# EAGLE board Particlematrix10x5 (EAGLE 7.3.0)
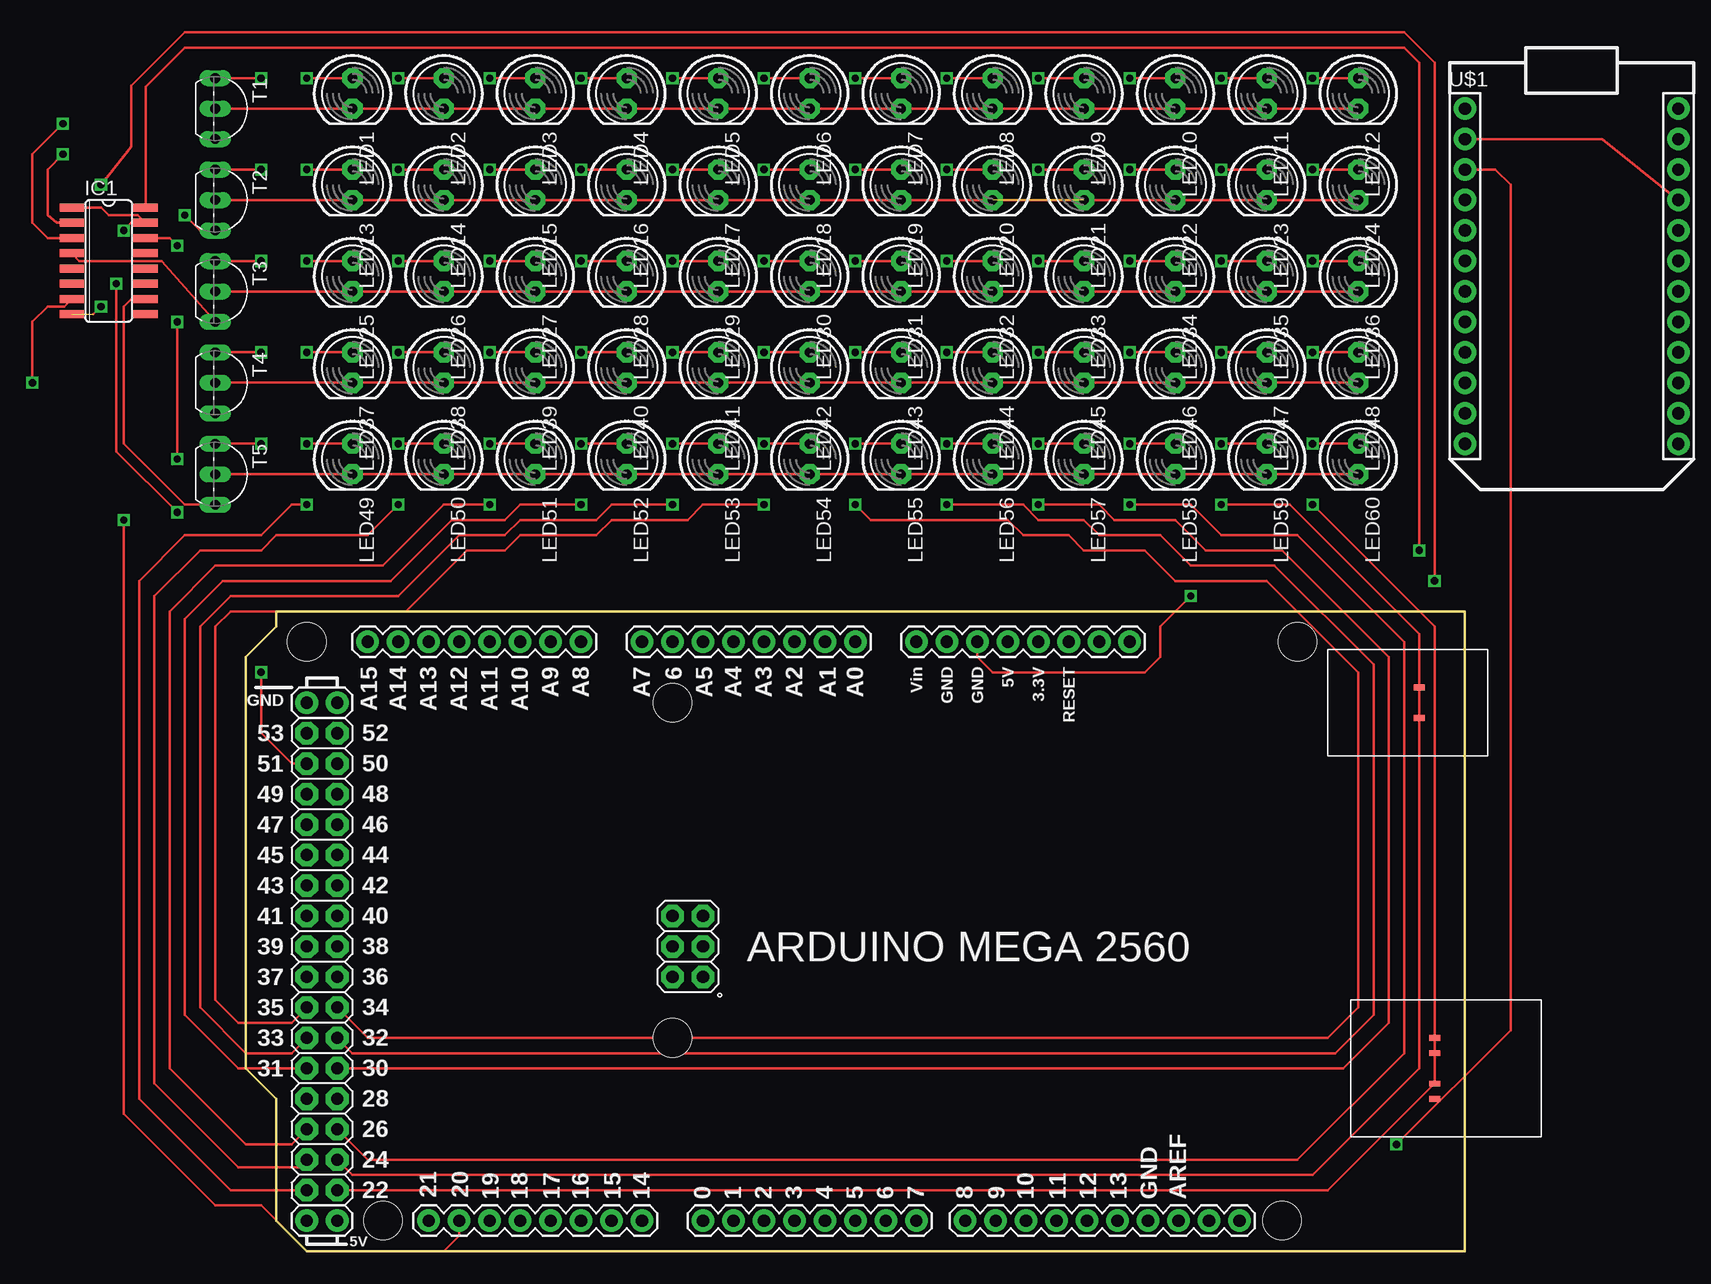
[diagram p0: board, top side]
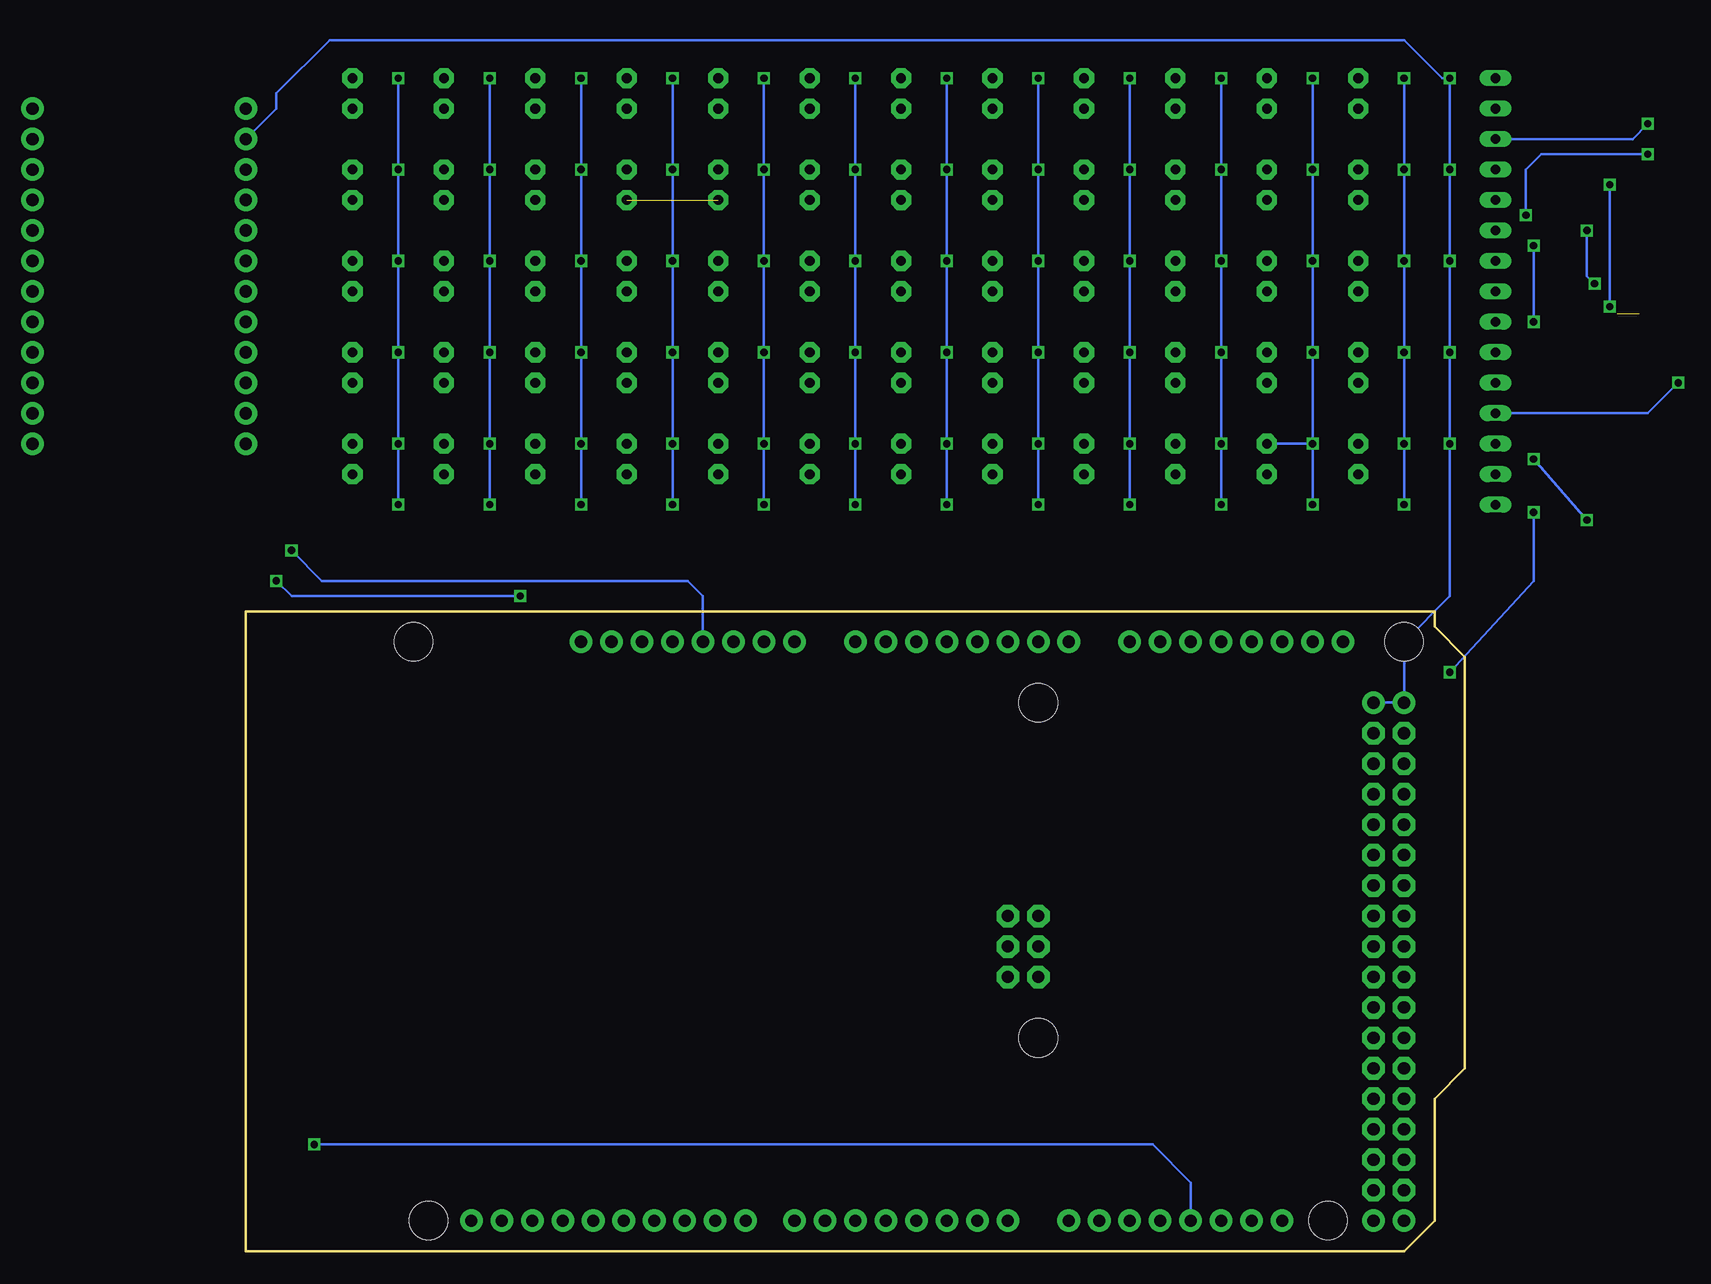
[diagram p1: board, bottom side, seen from below]

Size 101.6 x 53.34 mm. Coordinates in mm from the lower left corner, seen from the top.
Copper layers (1*16): Top 0.035mm / dielectric 1.5mm / Bottom 0.035mm
Design rules "default": minimum track width 10mil, minimum drill 24mil, track to track 8mil, track to pad 8mil, pad to pad 8mil, via to via 8mil, smd to smd 8mil, copper to edge 40mil, drill to drill 8mil, minimum pad ring 10mil, minimum via ring 8mil, stop-mask expansion 4mil, vias tented up to drill 0mil, thermal gap 10mil

## Footprints (pad centres in the part's own frame; a part is rotated, then mirrored left to right if it is on the bottom)
SO16 = smd 0.66 x 2.032: 1 -4.445,-3.073; 2 -3.175,-3.073; 3 -1.905,-3.073; 4 -0.635,-3.073; 5 0.635,-3.073; 6 1.905,-3.073; 7 3.175,-3.073; 8 4.445,-3.073; 9 4.445,3.073; 10 3.175,3.073; 11 1.905,3.073; 12 0.635,3.073; 13 -0.635,3.073; 14 -1.905,3.073; 15 -3.175,3.073; 16 -4.445,3.073
LED5MM = drill 0.813 pad 1.676 octagon: A -1.27,0; K 1.27,0
ARDUINO_MEGA2560 = drill 1.016 pad 1.88: 0 63.5,50.8; 1 60.96,50.8; 2 58.42,50.8; 3 55.88,50.8; 3.3V 35.56,2.54; 4 53.34,50.8; 5 50.8,50.8; 5V 38.1,2.54; 5V. 93.98,50.8; 5V.. 96.52,50.8; 6 48.26,50.8; 7 45.72,50.8; 8 41.656,50.8; 9 39.116,50.8; 10 36.576,50.8; 11 34.036,50.8; 12 31.496,50.8; 13 28.956,50.8; 14 68.58,50.8; 15 71.12,50.8; 16 73.66,50.8; 17 76.2,50.8; 18 78.74,50.8; 19 81.28,50.8; 20 83.82,50.8; 21 86.36,50.8; A0 50.8,2.54; A1 53.34,2.54; A2 55.88,2.54; A3 58.42,2.54; A4 60.96,2.54; A5 63.5,2.54; A6 66.04,2.54; A7 68.58,2.54; A8 73.66,2.54; A9 76.2,2.54; A10 78.74,2.54; A11 81.28,2.54; A12 83.82,2.54; A13 86.36,2.54; A14 88.9,2.54; A15 91.44,2.54; AREF 23.876,50.8; GND 26.416,50.8; GND. 43.18,2.54; GND.. 40.64,2.54; GND... 93.98,7.62; GND.... 96.52,7.62; I/OREF 30.48,2.54; N/C 27.94,2.54; RESET 33.02,2.54; SCL1 18.796,50.8; SDA1 21.336,50.8; VIN 45.72,2.54 | drill 1.016 pad 1.88 octagon: 22 93.98,48.26; 23 96.52,48.26; 24 93.98,45.72; 25 96.52,45.72; 26 93.98,43.18; 27 96.52,43.18; 28 93.98,40.64; 29 96.52,40.64; 30 93.98,38.1; 31 96.52,38.1; 32 93.98,35.56; 33 96.52,35.56; 34 93.98,33.02; 35 96.52,33.02; 36 93.98,30.48; 37 96.52,30.48; 38 93.98,27.94; 39 96.52,27.94; 40 93.98,25.4; 41 96.52,25.4; 42 93.98,22.86; 43 96.52,22.86; 44 93.98,20.32; 45 96.52,20.32; 46 93.98,17.78; 47 96.52,17.78; 48 93.98,15.24; 49 96.52,15.24; 50 93.98,12.7; 51 96.52,12.7; 52 93.98,10.16; 53 96.52,10.16; +5V_ 66.04,30.48; GND__ 66.04,25.4; MISO 63.5,30.48; MOSI 66.04,27.94; RESET. 63.5,25.4; SCK 63.5,27.94 | smd 1.016 x 0.508: <PWR>+V 3.81,8.89; <PWR>-V 3.81,6.35; <USB>+V 2.54,40.64; <USB>D+ 2.54,39.37; <USB>D- 2.54,36.83; <USB>GND 2.54,35.56 | hole 3.2: 15.24,50.8; 13.97,2.54; 66.04,35.56; 66.04,7.62; 90.17,50.8; 96.52,2.54
TO92-EBC = drill 0.813 long: B 0,-1.27; C 2.54,-1.27; E -2.54,-1.27
SPARK_CORE = drill 1.016 pad 1.88: 1 -8.89,13.97; 2 -8.89,11.43; 3 -8.89,8.89; 4 -8.89,6.35; 5 -8.89,3.81; 6 -8.89,1.27; 7 -8.89,-1.27; 8 -8.89,-3.81; 9 -8.89,-6.35; 10 -8.89,-8.89; 11 -8.89,-11.43; 12 -8.89,-13.97; 13 8.89,-13.97; 14 8.89,-11.43; 15 8.89,-8.89; 16 8.89,-6.35; 17 8.89,-3.81; 18 8.89,-1.27; 19 8.89,1.27; 20 8.89,3.81; 21 8.89,6.35; 22 8.89,8.89; 23 8.89,11.43; 24 8.89,13.97

## Placement (x,y rotation side)
IC1  4017D  [SO16]  -11.43,82.55 270 top  (outside the outline)
LED1  [LED5MM]  8.89,96.52 270 top  (outside the outline)
LED2  [LED5MM]  16.51,96.52 270 top  (outside the outline)
LED3  [LED5MM]  24.13,96.52 270 top  (outside the outline)
LED4  [LED5MM]  31.75,96.52 270 top  (outside the outline)
LED5  [LED5MM]  39.37,96.52 270 top  (outside the outline)
LED6  [LED5MM]  46.99,96.52 270 top  (outside the outline)
LED7  [LED5MM]  54.61,96.52 270 top  (outside the outline)
LED8  [LED5MM]  62.23,96.52 270 top  (outside the outline)
LED9  [LED5MM]  69.85,96.52 270 top  (outside the outline)
LED10  [LED5MM]  77.47,96.52 270 top  (outside the outline)
LED11  [LED5MM]  85.09,96.52 270 top  (outside the outline)
LED12  [LED5MM]  92.71,96.52 270 top  (outside the outline)
LED13  [LED5MM]  8.89,88.9 270 top  (outside the outline)
LED14  [LED5MM]  16.51,88.9 270 top  (outside the outline)
LED15  [LED5MM]  24.13,88.9 270 top  (outside the outline)
LED16  [LED5MM]  31.75,88.9 270 top  (outside the outline)
LED17  [LED5MM]  39.37,88.9 270 top  (outside the outline)
LED18  [LED5MM]  46.99,88.9 270 top  (outside the outline)
LED19  [LED5MM]  54.61,88.9 270 top  (outside the outline)
LED20  [LED5MM]  62.23,88.9 270 top  (outside the outline)
LED21  [LED5MM]  69.85,88.9 270 top  (outside the outline)
LED22  [LED5MM]  77.47,88.9 270 top  (outside the outline)
LED23  [LED5MM]  85.09,88.9 270 top  (outside the outline)
LED24  [LED5MM]  92.71,88.9 270 top  (outside the outline)
LED25  [LED5MM]  8.89,81.28 270 top  (outside the outline)
LED26  [LED5MM]  16.51,81.28 270 top  (outside the outline)
LED27  [LED5MM]  24.13,81.28 270 top  (outside the outline)
LED28  [LED5MM]  31.75,81.28 270 top  (outside the outline)
LED29  [LED5MM]  39.37,81.28 270 top  (outside the outline)
LED30  [LED5MM]  46.99,81.28 270 top  (outside the outline)
LED31  [LED5MM]  54.61,81.28 270 top  (outside the outline)
LED32  [LED5MM]  62.23,81.28 270 top  (outside the outline)
LED33  [LED5MM]  69.85,81.28 270 top  (outside the outline)
LED34  [LED5MM]  77.47,81.28 270 top  (outside the outline)
LED35  [LED5MM]  85.09,81.28 270 top  (outside the outline)
LED36  [LED5MM]  92.71,81.28 270 top  (outside the outline)
LED37  [LED5MM]  8.89,73.66 270 top  (outside the outline)
LED38  [LED5MM]  16.51,73.66 270 top  (outside the outline)
LED39  [LED5MM]  24.13,73.66 270 top  (outside the outline)
LED40  [LED5MM]  31.75,73.66 270 top  (outside the outline)
LED41  [LED5MM]  39.37,73.66 270 top  (outside the outline)
LED42  [LED5MM]  46.99,73.66 270 top  (outside the outline)
LED43  [LED5MM]  54.61,73.66 270 top  (outside the outline)
LED44  [LED5MM]  62.23,73.66 270 top  (outside the outline)
LED45  [LED5MM]  69.85,73.66 270 top  (outside the outline)
LED46  [LED5MM]  77.47,73.66 270 top  (outside the outline)
LED47  [LED5MM]  85.09,73.66 270 top  (outside the outline)
LED48  [LED5MM]  92.71,73.66 270 top  (outside the outline)
LED49  [LED5MM]  8.89,66.04 270 top  (outside the outline)
LED50  [LED5MM]  16.51,66.04 270 top  (outside the outline)
LED51  [LED5MM]  24.13,66.04 270 top  (outside the outline)
LED52  [LED5MM]  31.75,66.04 270 top  (outside the outline)
LED53  [LED5MM]  39.37,66.04 270 top  (outside the outline)
LED54  [LED5MM]  46.99,66.04 270 top  (outside the outline)
LED55  [LED5MM]  54.61,66.04 270 top  (outside the outline)
LED56  [LED5MM]  62.23,66.04 270 top  (outside the outline)
LED57  [LED5MM]  69.85,66.04 270 top  (outside the outline)
LED58  [LED5MM]  77.47,66.04 270 top  (outside the outline)
LED59  [LED5MM]  85.09,66.04 270 top  (outside the outline)
LED60  [LED5MM]  92.71,66.04 270 top  (outside the outline)
PCB1  ARDUINO_MEGA2560  [ARDUINO_MEGA2560]  101.6,53.34 180 top
T1  [TO92-EBC]  -1.27,95.25 270 top  (outside the outline)
T2  [TO92-EBC]  -1.27,87.63 270 top  (outside the outline)
T3  [TO92-EBC]  -1.27,80.01 270 top  (outside the outline)
T4  [TO92-EBC]  -1.27,72.39 270 top  (outside the outline)
T5  [TO92-EBC]  -1.27,64.77 270 top  (outside the outline)
U$1  SPARK_CORECORE  [SPARK_CORE]  110.49,81.28 0 top  (outside the outline)

## Library data of the parts
IC1 = 40xx
LED1-LED60 = adafruit
PCB1 = E14_Arduino_revB
T1-T5 = transistor-neu-to92
U$1 = Spark

## Nets
COL1: LED1.A LED13.A LED25.A LED37.A LED49.A PCB1.23
COL2: LED2.A LED14.A LED26.A LED38.A LED50.A PCB1.25
COL3: LED3.A LED15.A LED27.A LED39.A LED51.A PCB1.27
COL4: LED4.A LED16.A LED28.A LED40.A LED52.A PCB1.31
COL5: LED5.A LED17.A LED29.A LED41.A LED53.A PCB1.33
COL6: LED6.A LED18.A LED30.A LED42.A LED54.A PCB1.35
COL7: LED7.A LED19.A LED31.A LED43.A LED55.A PCB1.34
COL8: LED8.A LED20.A LED32.A LED44.A LED56.A PCB1.32
COL9: LED9.A LED21.A LED33.A LED45.A LED57.A PCB1.30
COL10: LED10.A LED22.A LED34.A LED46.A LED58.A PCB1.26
COL11: LED11.A LED23.A LED35.A LED47.A LED59.A PCB1.24
COL12: LED12.A LED24.A LED36.A LED48.A LED60.A PCB1.22
GND: PCB1.GND... PCB1.GND.... T1.E T2.E T3.E T4.E T5.E U$1.2 U$1.21
N$1: IC1.3 T1.C
N$2: IC1.2 T2.C
N$3: IC1.4 T3.C
N$4: IC1.7 T4.C
N$5: IC1.10 T5.C
N$6: IC1.16 PCB1.5V
N$7: IC1.14 PCB1.20
N$8: IC1.1 IC1.15 PCB1.51
N$9: IC1.8 PCB1.GND..
N$10: PCB1.18 U$1.3
RAW: U$1.1
ROW1: LED1.K LED2.K LED3.K LED4.K LED5.K LED6.K LED7.K LED8.K LED9.K LED10.K LED11.K LED12.K T1.B
ROW2: LED13.K LED14.K LED15.K LED16.K LED17.K LED18.K LED19.K LED20.K LED21.K LED22.K LED23.K LED24.K T2.B
ROW3: LED25.K LED26.K LED27.K LED28.K LED29.K LED30.K LED31.K LED32.K LED33.K LED34.K LED35.K LED36.K T3.B
ROW4: LED37.K LED38.K LED39.K LED40.K LED41.K LED42.K LED43.K LED44.K LED45.K LED46.K LED47.K LED48.K T4.B
ROW5: LED49.K LED50.K LED51.K LED52.K LED53.K LED54.K LED55.K LED56.K LED57.K LED58.K LED59.K LED60.K T5.B
VCC: U$1.24
VDDA: U$1.22

## Tracks (layer width: path | path; a pad name or v marks a point on that pad's centre or on a via)
COL1  (via drill 0.6)
  Top 0.203: LED1.A v5.08,97.79 | LED13.A v5.08,90.17 | LED25.A v5.08,82.55 | LED37.A v5.08,74.93 | v5.08,67.31 LED49.A | PCB1.23 -1.27,5.08 -8.89,12.7 -8.89,55.88 -5.08,59.69 1.27,59.69 3.81,62.23 v5.08,62.23
  Bottom 0.203: v5.08,97.79 v5.08,90.17 v5.08,82.55 v5.08,74.93 v5.08,67.31 v5.08,62.23
COL2  (via drill 0.6)
  Top 0.203: LED2.A v12.7,97.79 | LED14.A v12.7,90.17 | LED26.A v12.7,82.55 | LED38.A v12.7,74.93 | LED50.A v12.7,67.31 | v12.7,62.23 10.16,59.69 2.54,59.69 1.27,58.42 -3.81,58.42 -7.62,54.61 -7.62,13.97 -0.64,6.99 4.44,6.99 PCB1.25
  Bottom 0.203: v12.7,97.79 v12.7,90.17 v12.7,82.55 v12.7,74.93 v12.7,67.31 | LED50.A v12.7,67.31 | v12.7,67.31 v12.7,62.23
COL3  (via drill 0.6)
  Top 0.203: LED3.A v20.32,97.79 | LED15.A v20.32,90.17 | LED27.A v20.32,82.55 | LED39.A v20.32,74.93 | LED51.A v20.32,67.31 | v20.32,62.23 16.51,62.23 11.43,57.15 -2.54,57.15 -6.35,53.34 -6.35,15.24 0,8.89 3.81,8.89 PCB1.27
  Bottom 0.203: v20.32,97.79 v20.32,90.17 v20.32,82.55 v20.32,74.93 v20.32,67.31 v20.32,62.23
COL4  (via drill 0.6)
  Top 0.203: LED4.A v27.94,97.79 | LED16.A v27.94,90.17 | LED28.A v27.94,82.55 | LED40.A v27.94,74.93 | LED52.A v27.94,67.31 | v27.94,62.23 22.86,62.23 21.59,60.96 17.14,60.96 12.06,55.88 -1.91,55.88 -5.08,52.7 -5.08,19.69 -0.64,15.24 PCB1.31
  Bottom 0.203: v27.94,97.79 v27.94,90.17 v27.94,82.55 v27.94,74.93 v27.94,67.31 v27.94,62.23
COL5  (via drill 0.6)
  Top 0.203: LED5.A v35.56,97.79 | LED17.A v35.56,90.17 | LED29.A v35.56,82.55 | LED41.A v35.56,74.93 | LED53.A v35.56,67.31 | v35.56,62.23 30.48,62.23 29.21,60.96 22.86,60.96 21.59,59.69 17.78,59.69 12.7,54.61 -1.27,54.61 -3.81,52.07 -3.81,20.32 0,16.51 3.81,16.51 PCB1.33
  Bottom 0.203: v35.56,97.79 v35.56,90.17 v35.56,82.55 v35.56,74.93 v35.56,67.31 v35.56,62.23
COL6  (via drill 0.6)
  Top 0.203: LED6.A v43.18,97.79 | LED18.A v43.18,90.17 | LED30.A v43.18,82.55 | LED42.A v43.18,74.93 | v43.18,67.31 LED54.A | v43.18,62.23 38.1,62.23 36.83,60.96 30.48,60.96 29.21,59.69 22.86,59.69 21.59,58.42 18.41,58.42 13.33,53.34 -1.27,53.34 -2.54,52.07 -2.54,20.96 -0.64,19.05 3.81,19.05 PCB1.35
  Bottom 0.203: v43.18,97.79 v43.18,90.17 v43.18,82.55 v43.18,74.93 v43.18,67.31 v43.18,62.23
COL7  (via drill 0.6)
  Top 0.203: LED7.A v50.8,97.79 | LED19.A v50.8,90.17 | LED31.A v50.8,82.55 | LED43.A v50.8,74.93 | v50.8,67.31 LED55.A | v50.8,62.23 52.07,60.96 63.5,60.96 64.77,59.69 68.58,59.69 69.85,58.42 74.93,58.42 77.47,55.88 85.09,55.88 92.71,48.26 92.71,20.32 90.17,17.78 10.16,17.78 PCB1.34
  Bottom 0.203: v50.8,97.79 v50.8,90.17 v50.8,82.55 v50.8,74.93 v50.8,67.31 v50.8,62.23
COL8  (via drill 0.6)
  Top 0.203: LED8.A v58.42,97.79 | LED20.A v58.42,90.17 | LED32.A v58.42,82.55 | LED44.A v58.42,74.93 | v58.42,67.31 LED56.A | v58.42,62.23 64.77,62.23 66.04,60.96 69.85,60.96 71.12,59.69 76.2,59.69 78.74,57.15 85.72,57.15 93.98,48.9 93.98,19.69 90.8,16.51 8.89,16.51 PCB1.32
  Bottom 0.203: v58.42,97.79 v58.42,90.17 v58.42,82.55 v58.42,74.93 v58.42,67.31 v58.42,62.23
COL9  (via drill 0.6)
  Top 0.203: LED9.A v66.04,97.79 | LED21.A v66.04,90.17 | LED33.A v66.04,82.55 | LED45.A v66.04,74.93 | LED57.A v66.04,67.31 | v66.04,62.23 71.12,62.23 72.39,60.96 77.47,60.96 80.01,58.42 86.36,58.42 95.25,49.53 95.25,19.05 91.44,15.24 PCB1.30
  Bottom 0.203: v66.04,97.79 v66.04,90.17 v66.04,82.55 v66.04,74.93 v66.04,67.31 v66.04,62.23
COL10  (via drill 0.6)
  Top 0.203: LED10.A v73.66,97.79 | LED22.A v73.66,90.17 | LED34.A v73.66,82.55 | LED46.A v73.66,74.93 | v73.66,67.31 LED58.A | v73.66,62.23 78.74,62.23 81.28,59.69 87.63,59.69 96.52,50.8 96.52,16.51 87.63,7.62 10.16,7.62 PCB1.26
  Bottom 0.203: v73.66,97.79 v73.66,90.17 v73.66,82.55 v73.66,74.93 v73.66,67.31 v73.66,62.23
COL11  (via drill 0.6)
  Top 0.203: LED11.A v81.28,97.79 | LED23.A v81.28,90.17 | LED35.A v81.28,82.55 | LED47.A v81.28,74.93 | LED59.A v81.28,67.31 | v81.28,62.23 86.99,62.23 97.79,51.44 97.79,15.24 88.9,6.35 8.89,6.35 PCB1.24
  Bottom 0.203: v81.28,97.79 v81.28,90.17 v81.28,82.55 v81.28,74.93 v81.28,67.31 v81.28,62.23
COL12  (via drill 0.6)
  Top 0.203: LED12.A v88.9,97.79 | LED24.A v88.9,90.17 | LED36.A v88.9,82.55 | LED48.A v88.9,74.93 | v88.9,67.31 LED60.A | v88.9,62.23 99.06,52.07 99.06,13.97 90.17,5.08 PCB1.22
  Bottom 0.203: v88.9,97.79 v88.9,90.17 v88.9,82.55 v88.9,74.93 v88.9,67.31 v88.9,62.23
GND  (via drill 0.6)
  Top 0.203: T1.E v1.27,97.79 | T2.E v1.27,90.17 | T3.E v1.27,82.55 | v1.27,74.93 T4.E | T5.E v1.27,67.31 | U$1.21 113.03,92.71 U$1.2
  Bottom 0.203: v1.27,97.79 v1.27,90.17 | v1.27,90.17 v1.27,82.55 v1.27,74.93 v1.27,67.31 | v1.27,90.17 v1.27,67.31 | v1.27,67.31 v1.27,97.79 | v1.27,97.79 1.9,97.79 5.08,100.97 94.61,100.97 99.06,96.52 99.06,95.25 U$1.2 | v1.27,67.31 1.27,54.61 5.08,50.8 PCB1.GND.... PCB1.GND...
N$1  (via drill 0.6)
  Top 0.203: IC1.3 -16.51,84.45 -17.78,85.73 -17.78,91.44 v-15.24,93.98
  Bottom 0.203: v-15.24,93.98 -13.97,92.71 T1.C
N$2  (via drill 0.6)
  Top 0.203: T2.C -3.81,85.09 v-5.08,86.36 | v-15.24,91.44 -16.51,90.17 -16.51,86.36 -15.77,85.73 IC1.2
  Bottom 0.203: v-5.08,86.36 -5.08,90.17 -6.35,91.44 v-15.24,91.44
N$3
  Top 0.203: IC1.4 -13.87,82.55 -6.99,82.55 T3.C
N$4  (via drill 0.6)
  Top 0.203: IC1.7 -15.14,78.74 -16.51,78.74 -17.78,77.47 v-17.78,72.39
  Bottom 0.203: T4.C -15.24,69.85 v-17.78,72.39
N$5
  Top 0.203: IC1.10 -9.53,79.38 -10.16,78.74 -10.16,67.31 -5.08,62.23 T5.C
N$6  (via drill 0.6)
  Top 0.203: v97.79,58.42 97.79,99.06 96.52,100.33 -5.08,100.33 -8.36,97.05 IC1.16
  Bottom 0.203: v97.79,58.42 95.25,55.88 64.77,55.88 63.5,54.61 PCB1.5V
N$7  (via drill 0.6)
  Top 0.203: IC1.14 -6.35,84.45 v-5.72,83.82 | PCB1.20 17.78,1.27 16.51,0 5.08,0 1.27,3.81 -2.54,3.81 -10.16,11.43 v-10.16,60.96 | v-5.72,77.47 v-5.72,66.04
  Bottom 0.203: v-10.16,60.96 v-5.72,66.04 | v-5.72,83.82 v-5.72,77.47
N$8  (via drill 0.6)
  Top 0.203: IC1.1 -12.07,87 -11.43,86.36 -8.99,86.36 IC1.15 -9.53,85.73 v-10.16,85.09 | v-10.8,80.64 -10.8,66.67 v-5.72,61.59 | v1.27,48.26 1.27,43.18 3.81,40.64 PCB1.51
  Bottom 0.203: v-10.16,85.09 -10.16,81.28 v-10.8,80.64 | v-5.72,61.59 -5.72,55.88 v1.27,48.26
N$9  (via drill 0.6)  (1 unrouted)
  Top 0.203: -12.7,78.11 v-12.07,78.74 | v-12.07,88.9 -9.53,92.08 -9.53,97.16 -5.08,101.6 96.52,101.6 99.06,99.06 v99.06,55.88 | v78.74,54.61 76.2,52.07 76.2,49.53 74.93,48.26 62.23,48.26 60.96,49.53 PCB1.GND..
  Bottom 0.203: v-12.07,78.74 v-12.07,88.9 | v99.06,55.88 97.79,54.61 v78.74,54.61
N$10  (via drill 0.6)
  Top 0.203: U$1.3 104.14,90.17 105.41,88.9 105.41,18.42 v95.88,8.89
  Bottom 0.203: v95.88,8.89 26.03,8.89 22.86,5.72 PCB1.18
ROW1
  Top 0.203: LED12.K LED11.K LED10.K LED9.K LED8.K LED7.K LED6.K LED5.K LED4.K LED3.K LED2.K LED1.K T1.B
ROW2  (1 unrouted)
  Top 0.203: LED24.K LED23.K LED22.K LED21.K LED19.K LED18.K LED17.K LED16.K LED15.K LED14.K LED13.K T2.B
ROW3
  Top 0.203: LED36.K LED35.K LED34.K LED33.K LED32.K LED31.K LED30.K LED29.K LED28.K LED27.K LED26.K LED25.K T3.B
ROW4
  Top 0.203: LED48.K LED47.K LED46.K LED45.K LED44.K LED43.K LED42.K LED41.K LED40.K LED39.K LED38.K LED37.K T4.B
ROW5
  Top 0.203: LED60.K LED59.K LED58.K LED57.K LED56.K LED55.K LED54.K LED53.K LED52.K LED51.K LED50.K LED49.K T5.B